# Altium PCB PCB尺寸封装装配图.PcbDoc
Units mm, origin at the board's own origin, x right, y up, seen from the top; angles counter-clockwise.
Board outline 116.84 x 104.14 mm, 2 copper layers (Top Layer, Bottom Layer); 19 components, 148 nets, 198 pads, 0 vias.
Unrouted connection lines stored in the file: 96.
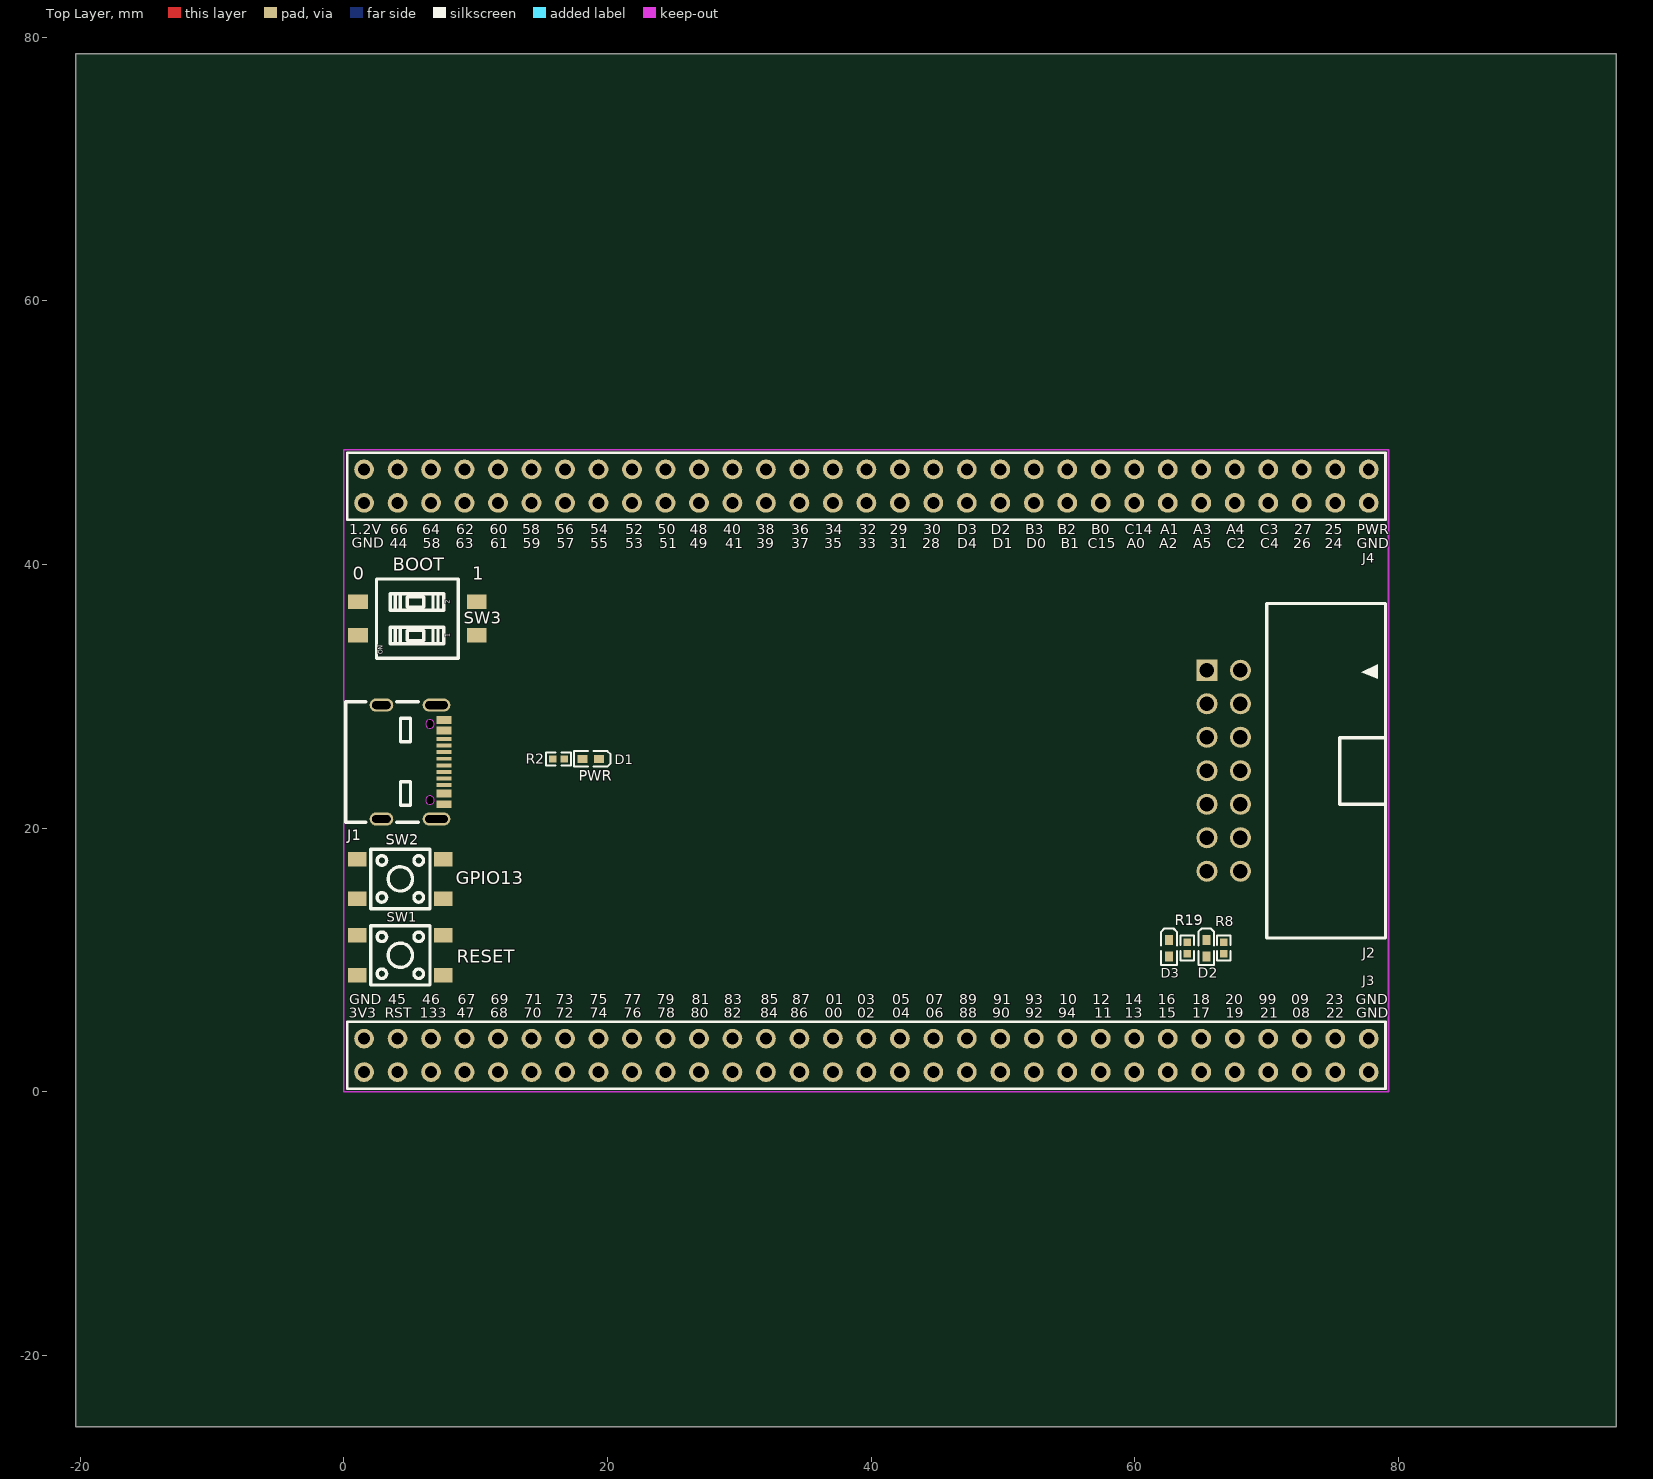
[diagram p0: Top Layer view]
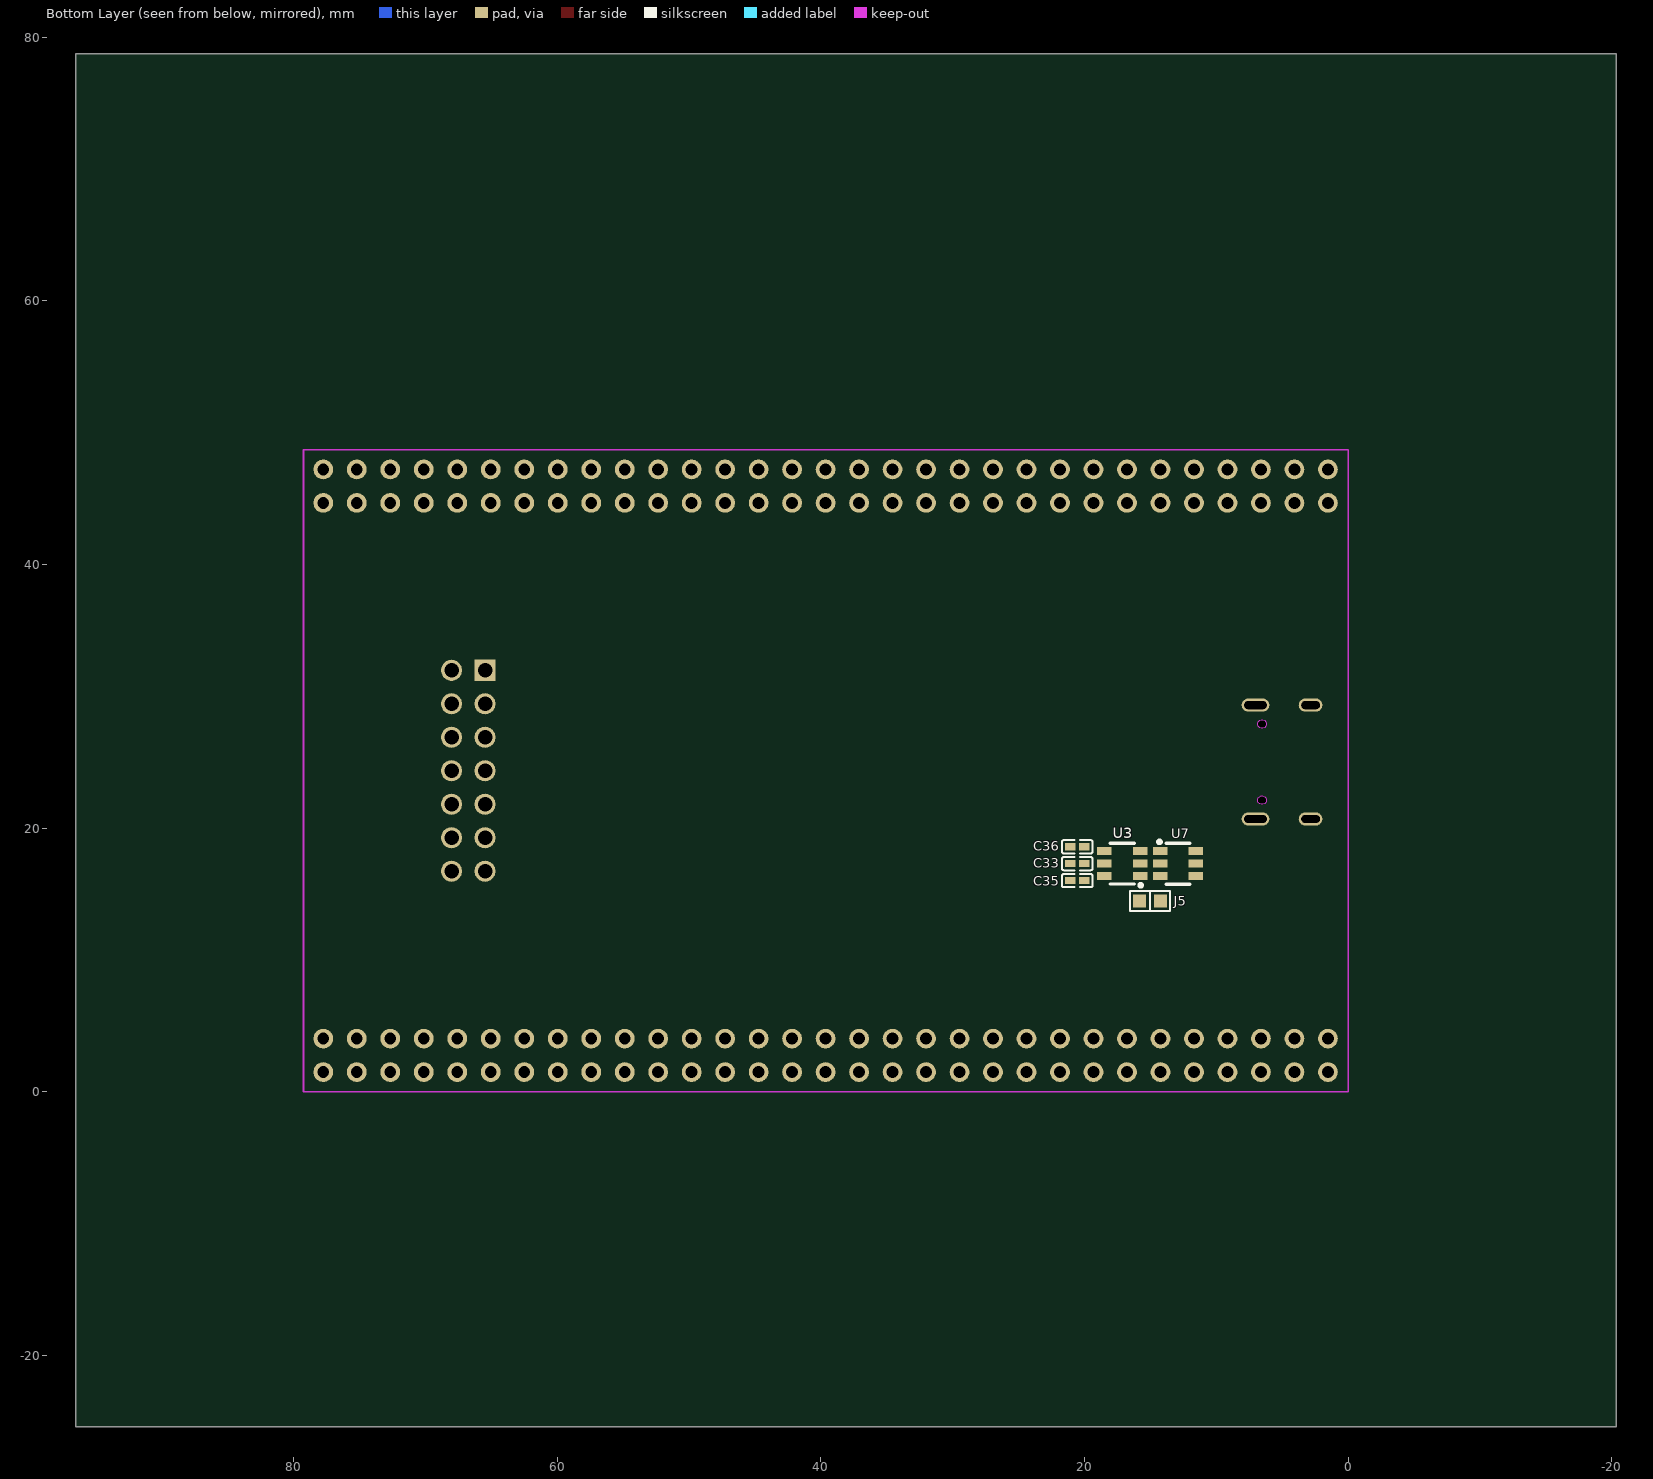
[diagram p1: Bottom Layer view, seen from below]

## Layer stack, top to bottom
Top Solder: solder mask 0.0102, Solder Resist, Dk 3.5
Top Layer: signal copper 0.0356
Dielectric1: core 0.32, FR-4, Dk 4.8
Bottom Layer: signal copper 0.0356
Bottom Solder: solder mask 0.0102, Solder Resist, Dk 3.5

## Board outline
-20.32,-25.4 -20.32,78.74 96.52,78.74 96.52,-25.4

## Design rules (kind name [scope] priority, off if disabled: settings)
Clearance [All] p1: gap=0.152 ignorepadtopadclearanceinfootprint=FALSE except(0: Arc-Hole Track-Hole SMDPad-Hole THPad-Hole Via-Hole Fill-Hole Poly-Hole Region-Hole Text-Hole; 0.254: Arc-Fill Arc-Poly Arc-Region Track-Fill Track-Poly Track-Region SMDPad-Fill SMDPad-Poly SMDPad-Region THPad-Fill THPad-Poly THPad-Region Via-Fill Via-Poly Via-Region Fill-Fill Fill-Poly Fill-Region Poly-Poly Poly-Region Region-Region)
ComponentClearance [All] p1: gap=-50 collisioncheckmode=3 verticalgap=0 showdistances=FALSE
DiffPairsRouting [All] p1: maxlimit=0.254 minlimit=0.203 mostfreqgap=0.203 toplayer_minwidth=0.152 toplayer_maxwidth=2.54 toplayer_prefwidth=0.152 bottomlayer_minwidth=0.152 bottomlayer_maxwidth=2.54 bottomlayer_prefwidth=0.152 maxuncoupledlength=100
FabricationTestPointUsage TestPointUsage [All] p1: valid=0 allowmultiple=FALSE
FabricationTestpoint Testpoint [(IsPad And (OnTopLayer Or OnBottomLayer))] p1: side=3 testpointundercomponent=TRUE minsize=1.016 maxsize=2.54 preferedsize=1.524 minholesize=0 maxholesize=1.016 preferedholesize=0.813 testpointgrid=0.025 allowsidetop=TRUE allowsidebottom=TRUE usegrid=TRUE gridtolerance=0
Height [All] p1: minheight=0 maxheight=30 prefheight=0
HoleSize [All] p1: absolutevalues=TRUE maxlimit=25.4 minlimit=0.025 maxpercent=80.000 minpercent=20.000
PlaneClearance [All] p1: clearance=0.254
PlaneConnect [All] p1: planeconnectstyle=Direct reliefexpansion=0.508 reliefentries=4 reliefconductorwidth=0.254 reliefairgap=0.254
PolygonConnect [All] p1: thpad.connectstyle=Relief thpad.reliefconductorwidth=0.762 thpad.reliefentries=4 thpad.polygonreliefangle="90 Angle" thpad.airgapwidth=0.254 smdpad.connectstyle=Direct smdpad.reliefconductorwidth=0.762 smdpad.reliefentries=4 smdpad.polygonreliefangle="90 Angle" smdpad.airgapwidth=0.254 via.connectstyle=Direct via.reliefconductorwidth=0.762 via.reliefentries=4 via.polygonreliefangle="90 Angle" via.airgapwidth=0.254
RoutingVias [All] p1: holewidth=0.3 width=0.5 viastyle="Through Hole" minholewidth=0.3 minwidth=0.5 maxholewidth=0.5 maxwidth=0.8
ShortCircuit [All] p1: allowed=TRUE
SolderMaskExpansion [All] p1: expansion=0.051 istentingtop=FALSE
Width [All] p1: maxlimit=2.54 minlimit=0.152 preferedwidth=0.152
21 further rules are at their usual default settings.

## Classes and differential pairs
differential pair USB0: +USB0_P -USB0_N

## Components (designator, comment, footprint, x,y, rotation, side; value= is the part's Value field where it differs from the comment)
C33 "0.1uF" C0402 20.56,17.31 r180 bottom
C35 "0.1uF" C0402 20.56,16.027 r180 bottom
C36 "0.1uF" C0402 20.56,18.593 r180 bottom
D1 "LED2" LED0402-R-RD 18.733,25.248 r180 top
D2 "LED2" LED0402-R-RD 65.43,10.885 r270 top
D3 "LED2" LED0402-R-RD 62.611,10.885 r270 top
J1 "TYPE-C" USB-C-SMD_MC-311D 5.232,25.019 r270 top
J2 "Header 7X2" CONN-TH_14P-P2.54_XKB_X9555WR-2X7-6TV01 66.751,24.359 r90 top locked
J3 "Header 31X2" HDR2X31 77.746,4.039 r180 top
J4 "Header 31X2" HDR2X31 1.546,44.679 r0 top
J5 "Open" R0603-R/C-BY 15.037,14.478 r180 bottom
R2 "1.5k" R0402 16.28,25.248 r0 top
R8 "1.5K" R0402 66.751,10.923 r270 top
R19 "1.5K" R0402 63.983,10.923 r270 top
SW1 "4.5x4.5x3.8贴片_C174049" SW-SMD_4P-L4.5-W4.5-P3.00-LS6.8 4.293,10.363 r180 top
SW2 "4.5x4.5x3.8贴片_C174049" SW-SMD_4P-L4.5-W4.5-P3.00-LS6.8 4.293,16.154 r180 top
SW3 "EM-02-Q" SW-SMD_DM-02-V-T-R 5.588,35.89 r90 top
U3 "TPS3808G33" SOT-23-6_L2.9-W1.6-P0.95-LS2.8-BR 17.145,17.323 r180 bottom
U7 "TPS3808G125" SOT-23-6_L2.9-W1.6-P0.95-LS2.8-BR 12.925,17.313 r0 bottom

## Footprints (in the part's own frame and the unit in brackets; to place one, negate y for a bottom-side part, rotate by r counter-clockwise, add the part's x,y. Pads: shape width x height; smd on the part's side, far side on the other; paste and mask are expansions set on the pad)
C0402 [mm]
  rect 0.79x0.54 smd paste-100 mask+0.051: 1(-0.545,0) 2(0.545,0)
  silkscreen extent -1.17,-0.5 1.17,0.5
CONN-TH_14P-P2.54_XKB_X9555WR-2X7-6TV01 [mm]
  rect 1.6x1.6 hole 1.1: 1(7.62,1.27)
  round 1.6 hole 1.1: 2(7.62,-1.27) 3(5.08,1.27) 4(5.08,-1.27) 5(2.54,1.27) 6(2.54,-1.27) 7(0,1.27) 8(0,-1.27) 9(-2.54,1.27) 10(-2.54,-1.27) 11(-5.08,1.27) 12(-5.08,-1.27) 13(-7.62,1.27) 14(-7.62,-1.27)
  silkscreen extent -12.69,-12.27 12.69,-3.27
HDR2X31 [mm] "Connector; Header; 30x2 Position"
  round 1.5 hole 0.9: 1(0,0) 2(0,2.54) 3(2.54,0) 4(2.54,2.54) 5(5.08,0) 6(5.08,2.54) 7(7.62,0) 8(7.62,2.54) 9(10.16,0) 10(10.16,2.54) 11(12.7,0) 12(12.7,2.54) 13(15.24,0) 14(15.24,2.54) 15(17.78,0) 16(17.78,2.54) 17(20.32,0) 18(20.32,2.54) 19(22.86,0) 20(22.86,2.54) 21(25.4,0) 22(25.4,2.54) 23(27.94,0) 24(27.94,2.54) 25(30.48,0) 26(30.48,2.54) 27(33.02,0) 28(33.02,2.54) 29(35.56,0) 30(35.56,2.54) 31(38.1,0) 32(38.1,2.54) 33(40.64,0) 34(40.64,2.54) 35(43.18,0) 36(43.18,2.54) 37(45.72,0) 38(45.72,2.54) 39(48.26,0) 40(48.26,2.54) 41(50.8,0) 42(50.8,2.54) 43(53.34,0) 44(53.34,2.54) 45(55.88,0) 46(55.88,2.54) 47(58.42,0) 48(58.42,2.54) 49(60.96,0) 50(60.96,2.54) 51(63.5,0) 52(63.5,2.54) 53(66.04,0) 54(66.04,2.54) 55(68.58,0) 56(68.58,2.54) 57(71.12,0) 58(71.12,2.54) 59(73.66,0) 60(73.66,2.54) 61(76.2,0) 62(76.2,2.54)
  silkscreen extent -1.27,-1.27 77.47,3.81
LED0402-R-RD [mm]
  rect 0.75x0.6 smd: 1(0.623,0) 2(-0.623,0)
  silkscreen extent -1.51,-0.61 1.26,0.58
R0402 [mm]
  rect 0.566x0.54 smd paste-100 mask+0.051: 1(-0.433,0) 2(0.433,0)
  silkscreen extent -0.94,-0.5 0.94,0.5
R0603-R/C-BY [mm]
  rect 1x1 smd: 1(-0.8,0) 2(0.8,0)
  silkscreen extent -1.52,-0.76 1.52,0.76, body extent -0.97,-0.36 1.03,0.43, height 0.79
SOT-23-6_L2.9-W1.6-P0.95-LS2.8-BR [mm]
  rect 1.1x0.6 smd paste+0 mask+0.051: 1(1.35,-0.95) 2(1.35,0) 3(1.35,0.95) 4(-1.35,0.95) 5(-1.35,0) 6(-1.35,-0.95)
  silkscreen extent -0.9,-1.78 1.52,1.55
SW-SMD_4P-L4.5-W4.5-P3.00-LS6.8 [mm]
  rect 1.4x1.1 smd: 1(-3.25,1.5) 2(3.25,1.5) 3(-3.25,-1.5) 4(3.25,-1.5)
  silkscreen extent -2.25,-2.25 2.25,2.25
SW-SMD_DM-02-V-T-R [mm]
  rect 1.1x1.5 smd: 1(-1.27,-4.5) 2(1.27,-4.5) 3(1.27,4.5) 4(-1.27,4.5)
  silkscreen extent -3.01,-3.1 3.01,3.1
USB-C-SMD_MC-311D [mm]
  oval 1x2.1 hole 0.6 slot 1.7 at 90 deg paste+0 mask+0.05: 1(-4.32,1.808) 4(4.32,1.808)
  oval 1x1.8 hole 0.6 slot 1.4 at 90 deg paste+0 mask+0.05: 2(-4.32,-2.372) 3(4.32,-2.372)
  rect 0.6x1.15 smd paste-100 mask+0.05: A1-B12(-3.2,2.372) A4-B9(-2.4,2.372) B1-A12(3.2,2.372) B4-A9(2.4,2.372)
  rect 0.3x1.15 smd paste-100 mask+0.05: A5(-1.25,2.372) A6(-0.25,2.372) A7(0.25,2.372) A8(1.25,2.372) B5(1.75,2.372) B6(0.75,2.372) B7(-0.75,2.372) B8(-1.75,2.372)
  Keep-Out Layer board cut-out: -2.565,1.307 -2.565,1.372 -2.614,1.492 -2.706,1.583 -2.825,1.632 -2.955,1.632 -3.074,1.583 -3.166,1.492 -3.215,1.372 -3.215,1.307 -3.215,1.243 -3.166,1.123 -3.074,1.032 -2.955,0.982 -2.825,0.982 -2.706,1.032 -2.614,1.123 -2.565,1.243 -2.565,1.307
  Keep-Out Layer board cut-out: 3.215,1.307 3.215,1.372 3.166,1.492 3.074,1.583 2.955,1.632 2.825,1.632 2.706,1.583 2.614,1.492 2.565,1.372 2.565,1.307 2.565,1.243 2.614,1.123 2.706,1.032 2.825,0.982 2.955,0.982 3.074,1.032 3.166,1.123 3.215,1.243 3.215,1.307
  silkscreen extent -4.57,-5.08 4.57,0.44

## Part data
C33 C35 C36: library part C3
J1: library part MC-311D, JLCPCB Part Class="Extended Part", LCSC Part Name="Type-C 母座", Manufacturer=SOFNG(硕方), Add into BOM=yes, Connector Type=Type-C, Convert to PCB=yes, Datasheet=https://atta.szlcsc.com/upload/public/pdf/source/20200911/C136423_B6E9AB4DF8CDF4010F036AD62AD75C35.pdf, Device=MC-311D, Gender=母座, Manufacturer Part=MC-311D, Name=MC-311D, Number of Contacts=12, Number of Ports=1, Standard=-, Supplier=LCSC, Supplier Footprint=SMD, Supplier Part=C136423, Symbol=MC-311D
J2: "Header, 7-Pin, Dual row", Publisher="Altium Limited", Revision="17-Jul-2002: Re-released for DXP Platform."
J3 J4: "Header, 30-Pin, Dual row", LatestRevisionDate=17-Jul-2002, LatestRevisionNote="Re-released for DXP Platform.", Publisher="Altium Limited"
J5: library part "Circuit Breaker", "Circuit Breaker", Published=24-Mar-1999, Publisher="Altium Limited", Revision="July-2002: Re-released for DXP Platform."
R2 R8 R19: library part R3
SW1 SW2: Actuator/Cap Color=黑色, Contact Current=50mA, Insulation Resistance=100MΩ, IP Rating=-, JLCPCB Part Class="Extended Part", LCSC Part Name="4.5*4.5*3.8mm 立贴 轻触开关", Manufacturer=BOOMELE(博穆精密), Manufacturer Part=4.5x4.5x3.8贴片, Operating Force=260gf@±50gf, Operating Temperature=-20℃~+80℃, Voltage Rating (DC)=12V, Actuator Style=圆形按钮, Add into BOM=yes, Circuit=单刀单掷, Convert to PCB=yes, Datasheet=https://atta.szlcsc.com/upload/public/pdf/source/20200916/C174049_C7EFE601E72DB861B2B81D6E1A27ADFA.pdf, Device=4.5x4.5x3.8贴片_C174049, Mechanical Life=10万次, Mounting Style=立贴, Name=4.5x4.5x3.8贴片, Pin Style=鸥翼型, Power Rating=-, Strike Gundam=否, Supplier=LCSC, Supplier Footprint=SMD, Supplier Part=C174049, Switch Height=3.8mm, Switch Length=4.5mm, Switch Width=4.5mm, Symbol=C174049, Voltage Rating (AC)=-, With Lamp=-
SW3: JLCPCB Part Class="Extended Part", LCSC Part Name=2位贴片拨码, Manufacturer=圜达, Add into BOM=yes, Convert to PCB=yes, Datasheet=https://atta.szlcsc.com/upload/public/pdf/source/20170504/1493892386551.pdf, Device=EM-02-Q, Manufacturer Part=EM-02-Q, Name=EM-02-Q, Supplier=LCSC, Supplier Footprint=SMD-4P,5x6mm, Supplier Part=C501539, Symbol=EM-02-Q
U3 U7: library part TPS3808

## Nets (pads, with @x,y where several pads share a name; then routed paths per layer and width w, separated by ;. In a path a pad name is that pad's centre, name@x,y a point inside that pad or via, vN(x,y) a via of type N, cw(c..) or ccw(c..) an arc to the next point about the centre after c; other vN are vias at no path point)
ADC14: J4.48
ADC15: J4.45
ADCA0: J4.47
ADCA1: J4.50
ADCA2: J4.49
ADCA3: J4.52
ADCA4: J4.54
ADCA5: J4.51
ADCB0: J4.46
ADCB1: J4.43
ADCB2: J4.44
ADCB3: J4.42
ADCC2: J4.53
ADCC3: J4.56
ADCC4: J4.55
ADCD0: J4.41
ADCD1: J4.39
ADCD2: J4.40
ADCD3: J4.38
ADCD4: J4.37
AGND: 
AVDD3.3: 
EM1D12: J3.50 SW3.2
EMU0: J2.13
EMU1: J2.14
GND: C33.1 C35.1 C36.1 D1.2 J1.1 J1.2 J1.3 J1.4 J1.A1-B12 J1.B1-A12 J2.4 J2.8 J2.10 J2.12 J3.1 J3.2 J3.61 J4.1 J4.61 SW1.1 SW1.2 SW2.3 SW2.4 U3.2 U7.2
GPIO00: J3.34
GPIO01: J3.33
GPIO02: J3.32
GPIO03: J3.31
GPIO04: J3.30
GPIO05: J3.29
GPIO06: J3.28
GPIO07: J3.27
GPIO08: J3.6
GPIO09: J3.5
GPIO10: J3.19
GPIO11: J3.18
GPIO12: J3.17
GPIO13: J3.16 SW2.1 SW2.2
GPIO14: J3.15
GPIO15: J3.14
GPIO16: J3.13
GPIO17: J3.12
GPIO18: J3.11
GPIO19: J3.10
GPIO20: J3.9
GPIO21: J3.8
GPIO22: J3.4
GPIO23: J3.3
GPIO24: J4.59
GPIO25: J4.60
GPIO26: J4.57
GPIO27: J4.58
GPIO28: J4.35
GPIO29: J4.34
GPIO30: J4.36
GPIO31: J4.33
GPIO32: J4.32
GPIO33: J4.31
GPIO34: J4.30
GPIO35: D2.2 J4.29
GPIO36: D3.2 J4.28
GPIO37: J4.27
GPIO38: J4.26
GPIO39: J4.25
GPIO40: J4.24
GPIO41: J4.23
GPIO44: J4.3
GPIO45: J3.59
GPIO46: J3.57
GPIO47: J3.56
GPIO48: J4.22
GPIO49: J4.21
GPIO50: J4.20
GPIO51: J4.19
GPIO52: J4.18
GPIO53: J4.17
GPIO54: J4.16
GPIO55: J4.15
GPIO56: J4.14
GPIO57: J4.13
GPIO58: J4.12
GPIO59: J4.11
GPIO60: J4.10
GPIO61: J4.9
GPIO62: J4.8
GPIO63: J4.7
GPIO64: J4.6
GPIO65: J4.5
GPIO66: J4.4
GPIO67: J3.55
GPIO68: J3.54
GPIO69: J3.53
GPIO70: J3.52
GPIO71: J3.51
GPIO73: J3.49
GPIO74: J3.48
GPIO75: J3.47
GPIO76: J3.46
GPIO77: J3.45
GPIO78: J3.44
GPIO79: J3.43
GPIO80: J3.42
GPIO81: J3.41
GPIO82: J3.40
GPIO83: J3.39
GPIO84: J3.38 SW3.1
GPIO85: J3.37
GPIO86: J3.36
GPIO87: J3.35
GPIO88: J3.26
GPIO89: J3.25
GPIO90: J3.24
GPIO91: J3.23
GPIO92: J3.22
GPIO93: J3.21
GPIO94: J3.20
GPIO99: J3.7
GPIO133: J3.58
NetC26_1: 
NetC29_1: 
NetC36_2: C36.2 U3.4
NetD1_1: D1.1 R2.2
NetD2_1: D2.1 R8.2
NetD3_1: D3.1 R19.2
NetJ1_A5: J1.A5
NetJ1_B5: J1.B5
NetJ5_2: J5.2 U7.3
NetR3_1: SW3.3
NetR4_1: SW3.4
NetR18_1: 
NetR18_2: 
NetU3_3: U3.3 U7.1
NetU4_3: 
RESET: J3.60 J5.1 SW1.3 SW1.4 U3.1
TCK: J2.9 J2.11
TDI: J2.3
TDO: J2.7
TMS: J2.1
TRSTN: J2.2
USB0_N: J1.A7 J1.B7
USB0_P: J1.A6 J1.B6
VDD1.2: J4.2 U7.5
VDD3.3: C33.2 C35.2 J2.5 J3.62 R2.1 R8.1 R19.1 U3.5 U3.6 U7.6
VDD5.0: J1.A4-B9 J1.B4-A9 J4.62
VREF1: 
VREF2: 
pads on no net: J1.A8 J1.B8 J2.6 U7.4

## Keep-outs
Keep-Out Layer:
  lines w0.127: 79.248,48.692 79.248,48.717 0,48.717 0,0 79.248,0 79.248,48.692 ; 79.248,48.692 79.248,48.692

## Silkscreen, mask and mechanical layers (free items; w line width, h text height)
Top Overlay:
  text "1.2V" at 0.432,42.291 h0.76
  text "66" at 3.531,42.291 h0.76
  text "64" at 5.969,42.291 h0.76
  text "62" at 8.534,42.291 h0.76
  text "60" at 11.074,42.291 h0.76
  text "58" at 13.538,42.291 h0.76
  text "56" at 16.104,42.291 h0.76
  text "54" at 18.694,42.291 h0.76
  text "52" at 21.361,42.291 h0.76
  text "50" at 23.83,42.291 h0.76
  text "48" at 26.264,42.291 h0.76
  text "40" at 28.804,42.291 h0.76
  text "38" at 31.318,42.291 h0.76
  text "36" at 33.934,42.291 h0.76
  text "34" at 36.474,42.291 h0.76
  text "32" at 39.065,42.291 h0.76
  text "29" at 41.427,42.291 h0.76
  text "30" at 43.967,42.291 h0.76
  text "D3" at 46.533,42.291 h0.76
  text "D2" at 49.073,42.291 h0.76
  text "B3" at 51.714,42.291 h0.76
  text "B2" at 54.178,42.291 h0.76
  text "B0" at 56.693,42.291 h0.76
  text "C14" at 59.233,42.291 h0.76
  text "A1" at 61.951,42.291 h0.76
  text "A3" at 64.44,42.291 h0.76
  text "A4" at 66.954,42.291 h0.76
  text "C3" at 69.499,42.291 h0.76
  text "27" at 72.111,42.291 h0.76
  text "25" at 74.422,42.291 h0.76
  text "PWR" at 76.835,42.291 h0.76
  text "GND" at 0.61,41.275 h0.76
  text "44" at 3.505,41.25 h0.76
  text "58" at 5.994,41.25 h0.76
  text "63" at 8.509,41.25 h0.76
  text "61" at 11.111,41.25 h0.76
  text "59" at 13.564,41.25 h0.76
  text "57" at 16.15,41.25 h0.76
  text "55" at 18.694,41.25 h0.76
  text "53" at 21.361,41.25 h0.76
  text "51" at 23.952,41.25 h0.76
  text "49" at 26.26,41.25 h0.76
  text "41" at 28.931,41.25 h0.76
  text "39" at 31.293,41.25 h0.76
  text "37" at 33.934,41.25 h0.76
  text "35" at 36.449,41.25 h0.76
  text "33" at 39.014,41.25 h0.76
  text "31" at 41.427,41.25 h0.76
  text "28" at 43.891,41.25 h0.76
  text "D4" at 46.533,41.25 h0.76
  text "D1" at 49.225,41.25 h0.76
  text "D0" at 51.765,41.25 h0.76
  text "B1" at 54.407,41.25 h0.76
  text "C15" at 56.439,41.25 h0.76
  text "A2" at 61.849,41.25 h0.76
  text "A5" at 64.44,41.25 h0.76
  text "C2" at 66.98,41.25 h0.76
  text "C4" at 69.512,41.25 h0.76
  text "26" at 72.034,41.25 h0.76
  text "24" at 74.422,41.25 h0.76
  text "GND" at 76.835,41.25 h0.76
  text "A0" at 59.411,41.224 h0.76
  text "BOOT" at 3.708,39.548 h1
  text "0" at 0.686,38.862 h1
  text "1" at 9.754,38.862 h1
  text "PWR" at 17.831,23.597 h0.8
  text "GPIO13" at 8.484,15.748 h1
  text "RESET" at 8.585,9.804 h1
  text "GND" at 0.406,6.629 h0.76
  text "45" at 3.378,6.629 h0.76
  text "46" at 5.969,6.629 h0.76
  text "67" at 8.661,6.629 h0.76
  text "69" at 11.151,6.629 h0.76
  text "71" at 13.741,6.629 h0.76
  text "73" at 16.078,6.629 h0.76
  text "75" at 18.669,6.629 h0.76
  text "77" at 21.234,6.629 h0.76
  text "79" at 23.754,6.629 h0.76
  text "81" at 26.416,6.629 h0.76
  text "83" at 28.854,6.629 h0.76
  text "85" at 31.623,6.629 h0.76
  text "87" at 34.036,6.629 h0.76
  text "01" at 36.576,6.629 h0.76
  text "03" at 38.938,6.629 h0.76
  text "05" at 41.605,6.629 h0.76
  text "07" at 44.145,6.629 h0.76
  text "89" at 46.685,6.629 h0.76
  text "91" at 49.276,6.629 h0.76
  text "93" at 51.689,6.629 h0.76
  text "10" at 54.28,6.629 h0.76
  text "12" at 56.794,6.629 h0.76
  text "14" at 59.258,6.629 h0.76
  text "16" at 61.747,6.629 h0.76
  text "18" at 64.364,6.629 h0.76
  text "20" at 66.878,6.629 h0.76
  text "99" at 69.397,6.629 h0.76
  text "09" at 71.882,6.629 h0.76
  text "23" at 74.498,6.629 h0.76
  text "GND" at 76.777,6.629 h0.76
  text "3V3" at 0.381,5.613 h0.76
  text "RST" at 3.124,5.613 h0.76
  text "133" at 5.766,5.613 h0.76
  text "47" at 8.56,5.613 h0.76
  text "68" at 11.1,5.613 h0.76
  text "70" at 13.64,5.613 h0.76
  text "72" at 16.099,5.613 h0.76
  text "74" at 18.669,5.613 h0.76
  text "76" at 21.234,5.613 h0.76
  text "78" at 23.766,5.613 h0.76
  text "80" at 26.337,5.613 h0.76
  text "82" at 28.829,5.613 h0.76
  text "84" at 31.598,5.613 h0.76
  text "86" at 33.884,5.613 h0.76
  text "00" at 36.474,5.613 h0.76
  text "02" at 38.938,5.613 h0.76
  text "04" at 41.605,5.613 h0.76
  text "06" at 44.145,5.613 h0.76
  text "88" at 46.685,5.613 h0.76
  text "90" at 49.2,5.613 h0.76
  text "92" at 51.689,5.613 h0.76
  text "94" at 54.204,5.613 h0.76
  text "11" at 56.947,5.613 h0.76
  text "13" at 59.26,5.613 h0.76
  text "15" at 61.777,5.613 h0.76
  text "17" at 64.36,5.613 h0.76
  text "19" at 66.904,5.613 h0.76
  text "21" at 69.52,5.613 h0.76
  text "08" at 71.933,5.613 h0.76
  text "22" at 74.524,5.613 h0.76
  text "GND" at 76.802,5.613 h0.76

## Dimensions
0,48.717 to 0,0 on Top Overlay
39.646,1.499 to 42.186,1.499 on Top Overlay
0,48.717 to 79.248,48.717 on Top Overlay
1.546,44.679 to 1.546,4.039 on Top Overlay
79.021,37.049 to 79.248,48.717 on Top Overlay
79.021,11.669 to 79.248,0 on Top Overlay

## Text inside footprints (layer, text, board x,y; h text height)
J3: Bottom Overlay "1" at 133.626,4.547 h1.27 r180
J4: Bottom Overlay "1" at -54.334,44.171 h1.27
SW3: Top Overlay "ON" at 2.978,33.21 h0.32 r90; Top Overlay "1" at 8.058,34.493 h0.33 r90; Top Overlay "2" at 8.04,37.033 h0.33 r90